# Altium PCB Vias.PcbDoc
Units mil, origin at the board's own origin, x right, y up, seen from the top; angles counter-clockwise.
Board outline 250 x 200 mil, 2 copper layers (Top Layer, Bottom Layer); 3 components, 2 nets, 6 pads, 6 vias.
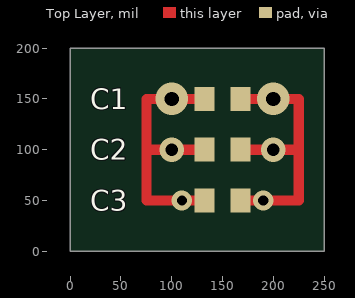
[diagram p0: Top Layer view]
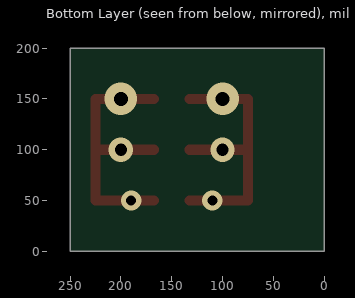
[diagram p1: Bottom Layer view, seen from below]

## Layer stack, top to bottom
Top Layer: signal copper 1.4
Dielectric: core 12.6, FR-4, Dk 4.8
Bottom Layer: signal copper 1.4

## Board outline
0,0 0,200 250,200 250,0

## Design rules (kind name [scope] priority, off if disabled: settings)
Clearance [All] p1: gap=10
MinimumSolderMaskSliver [All] p1: minsoldermaskwidth=4
PolygonConnect [All] p1: connectstyle=Relief reliefconductorwidth=10 reliefentries=4 polygonreliefangle="90 Angle" airgapwidth=10
RoutingVias [All] p1: holewidth=28 width=50 viastyle="Through Hole" minholewidth=28 minwidth=50 maxholewidth=28 maxwidth=50
SilkToSolderMaskClearance [IsPad] p1: minsilkscreentomaskgap=6 clearancetoexposedcopper=TRUE
SolderMaskExpansion [All] p1: expansion=4
Width [All] p1: maxlimit=10 minlimit=10 preferedwidth=10
26 further rules are at their usual default settings.

## Components (designator, comment, footprint, x,y, rotation, side; value= is the part's Value field where it differs from the comment)
C1 ".designator" CAPC1005X55N 150,150 r0 top
C2 ".designator" CAPC1005X55N 150,100 r0 top
C3 ".designator" CAPC1005X55N 150,50 r0 top

## Footprints (in the part's own frame and the unit in brackets; to place one, negate y for a bottom-side part, rotate by r counter-clockwise, add the part's x,y. Pads: shape width x height; smd on the part's side, far side on the other; paste and mask are expansions set on the pad)
CAPC1005X55N [mm]
  rect 0.5x0.6 smd mask+0.1: 1(-0.45,0) 2(0.45,0)
  body extent -0.53,-0.28 0.52,0.28, height 0.5

## Part data
C1 C2 C3: library part 10138, "Capacitor Non Polarized"

## Via types
v1: diameter 20.01, hole 10.01, Top Layer to Bottom Layer, tented both sides, 2 vias
v2: diameter 24.01, hole 12.01, Top Layer to Bottom Layer, tented both sides, 2 vias
v3: diameter 32.01, hole 14.01, Top Layer to Bottom Layer, tented both sides, 2 vias

## Nets (pads, with @x,y where several pads share a name; then routed paths per layer and width w, separated by ;. In a path a pad name is that pad's centre, name@x,y a point inside that pad or via, vN(x,y) a via of type N, cw(c..) or ccw(c..) an arc to the next point about the centre after c; other vN are vias at no path point)
GND: C1.2 C2.2 C3.2 | length 273.3
  Top Layer w10: C3.2 225,50 225,100 ; C2.2 v2(200,100) 225,100 ; C1.2 225,150 225,100 ; v1@191,49 v1@192,50
  other v1: 190,50
  other v3: 200,150
VCC: C1.1 C2.1 C3.1 | length 271.9
  Top Layer w10: C3.1 75,50 75,100 ; C2.1 75,100 ; C1.1 v3(100,150) 75,150 75,100
  other v1: 110,50
  other v2: 100,100

## Silkscreen, mask and mechanical layers (free items; w line width, h text height)
Mechanical 1:
  the board outline again, w1